# EAGLE board LEDArrayGame (EAGLE 7.6.0)

Size 73.58 x 63.39 mm. Coordinates in mm from the lower left corner, seen from the top.
Outline: 0,0 56.82,0 56.82,53.33 0,53.33 0,0
Copper layers (1*16): Top 0.035mm / dielectric 1.5mm / Bottom 0.035mm
Design rules "default": minimum track width 10mil, minimum drill 24mil, track to track 8mil, track to pad 8mil, pad to pad 8mil, via to via 8mil, smd to smd 8mil, copper to edge 40mil, drill to drill 8mil, minimum pad ring 10mil, minimum via ring 8mil, stop-mask expansion 4mil, vias tented up to drill 0mil, thermal gap 10mil

## Footprints (pad centres in the part's own frame; a part is rotated, then mirrored left to right if it is on the bottom)
LED5MM = drill 0.813 octagon: A -1.27,0; K 1.27,0
PIEZO-22MM = drill 1 pad 2.54: P$1 -5,0; P$2 5,0
0207/10 = drill 0.813 octagon: 1 -5.08,0; 2 5.08,0
B25V = drill 0.813 long: A 2.54,0.635; E -2.54,0.635; S 0,0.635
TL1105 = drill 1 pad 1.676: 1 -2.25,3.25; 2 2.25,3.25; 3 -2.25,-3.25; 4 2.25,-3.25
ARDUINO_UNO = drill 1.016 pad 1.88: 0 63.5,50.8; 1 60.96,50.8; 2 58.42,50.8; 3 55.88,50.8; 3.3V 35.56,2.54; 4 53.34,50.8; 5 50.8,50.8; 5V 38.1,2.54; 6 48.26,50.8; 7 45.72,50.8; 8 41.656,50.8; 9 39.116,50.8; 10 36.576,50.8; 11 34.036,50.8; 12 31.496,50.8; 13 28.956,50.8; A0 50.8,2.54; A1 53.34,2.54; A2 55.88,2.54; A3 58.42,2.54; A4 60.96,2.54; A5 63.5,2.54; AREF 23.876,50.8; GND 26.416,50.8; GND. 43.18,2.54; GND.. 40.64,2.54; I/OREF 30.48,2.54; N/C 27.94,2.54; RESET 33.02,2.54; SCL 18.796,50.8; SDA 21.336,50.8; VIN 45.72,2.54 | hole 3.2: 66.04,7.62; 66.04,35.56; 15.24,50.8; 13.97,2.54
TO92 = drill 0.813 octagon: 1 1.27,0; 2 0,1.905; 3 -1.27,0

## Placement (x,y rotation side)
D1  [LED5MM]  5,22.78 0 top
D2  [LED5MM]  5,48.18 0 top
D3  [LED5MM]  5,162.48 0 top  (outside the outline)
D4  [LED5MM]  5,175.18 0 top  (outside the outline)
D5  [LED5MM]  5,187.88 0 top  (outside the outline)
D6  [LED5MM]  5,200.58 0 top  (outside the outline)
D7  [LED5MM]  5,213.28 0 top  (outside the outline)
D8  [LED5MM]  5,225.98 0 top  (outside the outline)
D9  [LED5MM]  5,238.68 0 top  (outside the outline)
PIEZO1  [PIEZO-22MM]  5,352.98 0 top  (outside the outline)
R1  220‎Ω  [0207/10]  5,35.48 0 top
R2  220‎Ω  [0207/10]  5,60.88 0 top
R3  220‎Ω  [0207/10]  5,73.58 0 top  (outside the outline)
R4  220‎Ω  [0207/10]  5,86.28 0 top  (outside the outline)
R5  220‎Ω  [0207/10]  5,98.98 0 top  (outside the outline)
R6  220‎Ω  [0207/10]  5,111.68 0 top  (outside the outline)
R7  220‎Ω  [0207/10]  5,124.38 0 top  (outside the outline)
R8  220‎Ω  [0207/10]  5,137.08 0 top  (outside the outline)
R9  220‎Ω  [0207/10]  5,149.78 0 top  (outside the outline)
R10  50k‎Ω  [0207/10]  5,378.38 0 top  (outside the outline)
R11  1k‎Ω  [0207/10]  5,391.08 0 top  (outside the outline)
R12  20k‎Ω  [0207/10]  5,403.78 0 top  (outside the outline)
R13  1k‎Ω  [0207/10]  5,416.48 0 top  (outside the outline)
R14  2k‎Ω  [0207/10]  5,429.18 0 top  (outside the outline)
R15  1k‎Ω  [0207/10]  5,441.88 0 top  (outside the outline)
R16  10k‎Ω  [0207/10]  5,454.58 0 top  (outside the outline)
R17  1k‎Ω  [0207/10]  5,467.28 0 top  (outside the outline)
R18  20k‎Ω  [0207/10]  5,479.98 0 top  (outside the outline)
R19  50k‎Ω  [0207/10]  5,492.68 0 top  (outside the outline)
R20  10k‎Ω  [0207/10]  5,505.38 0 top  (outside the outline)
R21  2k‎Ω  [0207/10]  5,518.08 0 top  (outside the outline)
R22  1k‎Ω  [0207/10]  5,530.78 0 top  (outside the outline)
R23  1k‎Ω  [0207/10]  5,543.48 0 top  (outside the outline)
R24  1k‎Ω  [0207/10]  5,556.18 0 top  (outside the outline)
R25  1k‎Ω  [0207/10]  5,568.88 0 top  (outside the outline)
Rpot1  5k‎Ω  [B25V]  5,365.68 0 top  (outside the outline)
S1  [TL1105]  5,251.38 0 top  (outside the outline)
S2  [TL1105]  5,264.08 0 top  (outside the outline)
S3  [TL1105]  5,276.78 0 top  (outside the outline)
S4  [TL1105]  5,289.48 0 top  (outside the outline)
S5  [TL1105]  5,302.18 0 top  (outside the outline)
S6  [TL1105]  5,314.88 0 top  (outside the outline)
S7  [TL1105]  5,327.58 0 top  (outside the outline)
S8  [TL1105]  5,340.28 0 top  (outside the outline)
U1  [ARDUINO_UNO]  5,10.08 0 top
U2  [TO92]  5,581.58 0 top  (outside the outline)

## Library data of the parts
D1-D9 PIEZO1 R1-R25 Rpot1 S1-S8 U1 U2 = AUTODESK_CIRCUITS_BREADBOARD

## Nets
N$1: D2.A R2.2
N$2: D3.A R7.2
N$3: D4.A R3.2
N$4: D5.A R4.2
N$5: D6.A R8.2
N$6: D7.A R9.2
N$7: D8.A R5.2
N$8: D1.A R1.2
N$9: D9.A R6.2
N$10: R6.1 U1.10
N$11: R5.1 U1.9
N$12: R9.1 U1.8
N$13: R8.1 U1.7
N$14: R4.1 U1.6
N$15: R3.1 U1.5
N$16: R7.1 U1.4
N$17: R2.1 U1.3
N$18: R1.1 U1.2
N$19: S3.4
N$20: S3.1
N$21: R14.1 S3.2
N$22: S4.2
N$23: R16.1 S4.4
N$24: S7.4
N$25: S5.1 S7.3
N$26: S8.2
N$27: S8.3
N$28: R20.1 S8.4
N$29: S7.1
N$30: R21.1 S7.2
N$31: D1.K D2.K D3.K D4.K D5.K D6.K D7.K D8.K D9.K PIEZO1.P$2 R11.2 R13.2 R15.2 R17.1 R22.2 R23.2 R24.2 R25.1 Rpot1.E U1.GND.. U2.1
N$32: Rpot1.A U1.A5
N$33: PIEZO1.P$1 Rpot1.S
N$34: S6.4
N$35: R19.1 S6.2
N$36: S6.1
N$37: S5.4
N$38: R18.2 S5.2
N$39: S1.4
N$40: R10.1 S1.2
N$41: S2.4
N$42: R12.2 S2.2
N$43: S2.1 S3.3
N$44: R10.2 R11.1 R12.1 R13.1 R14.2 R15.1 R16.2 R17.2 U1.A0
N$45: S1.1
N$46: R18.1 R19.2 R20.2 R21.2 R22.1 R23.1 R24.1 R25.2 U1.A1
N$47: S4.3
N$48: U1.A3 U2.2
N$49: S1.3 S2.3 S4.1 S5.3 S6.3 S8.1 U1.5V U2.3

## Tracks (layer width: path | path; a pad name or v marks a point on that pad's centre or on a via)
N$1  (1 unrouted)
N$2  (1 unrouted)
N$3  (1 unrouted)
N$4  (1 unrouted)
N$5  (1 unrouted)
N$6  (1 unrouted)
N$7  (1 unrouted)
N$8  (1 unrouted)
N$9  (1 unrouted)
N$10  (1 unrouted)
N$11  (1 unrouted)
N$12  (1 unrouted)
N$13  (1 unrouted)
N$14  (1 unrouted)
N$15  (1 unrouted)
N$16  (1 unrouted)
N$17  (1 unrouted)
N$18  (1 unrouted)
N$21  (1 unrouted)
N$23  (1 unrouted)
N$25  (1 unrouted)
N$28  (1 unrouted)
N$30  (1 unrouted)
N$31  (20 unrouted)
N$32  (1 unrouted)
N$33  (1 unrouted)
N$35  (1 unrouted)
N$38  (1 unrouted)
N$40  (1 unrouted)
N$42  (1 unrouted)
N$43  (1 unrouted)
N$44  (8 unrouted)
N$46  (8 unrouted)
N$48  (1 unrouted)
N$49  (7 unrouted)